# Altium PCB File_Mach_In.PcbDoc
Units mil, origin at the board's own origin, x right, y up, seen from the top; angles counter-clockwise.
Board outline 4955 x 3230 mil, 2 copper layers (Top Layer, Bottom Layer); 64 components, 22 nets, 180 pads, 0 vias.
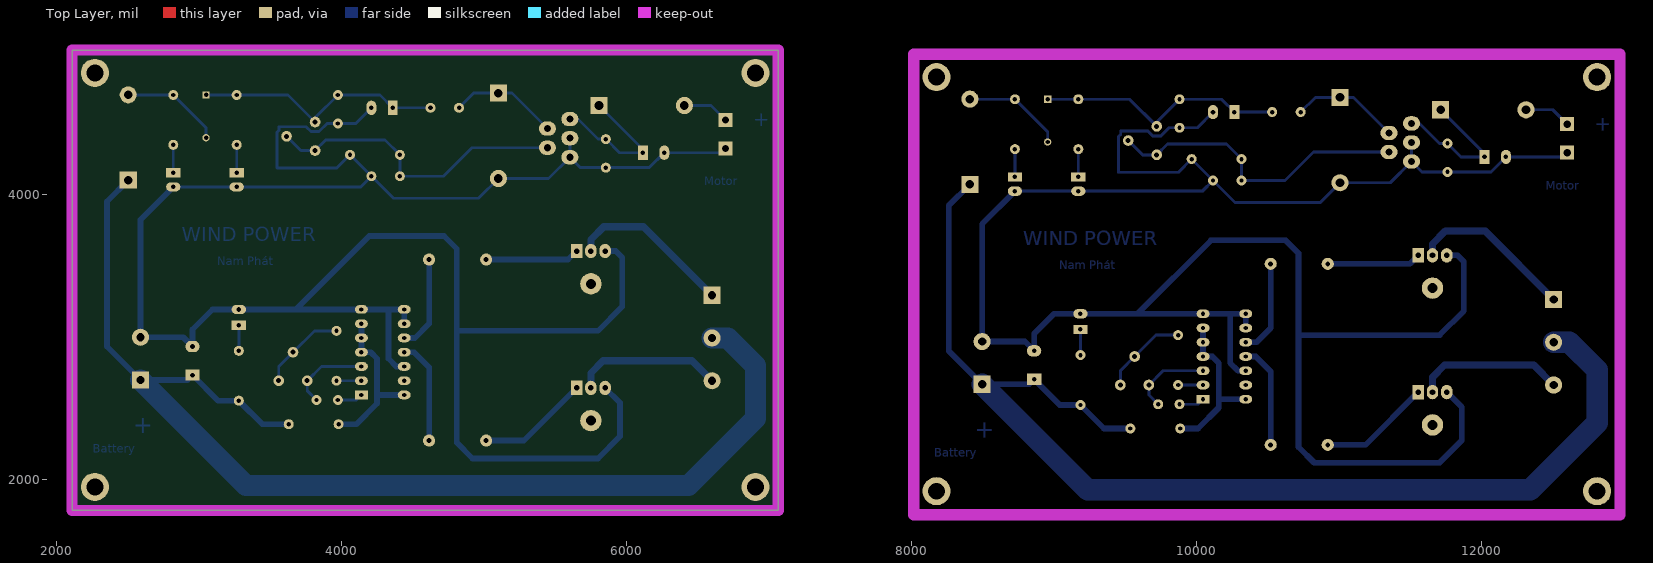
[diagram p0: Top Layer view]
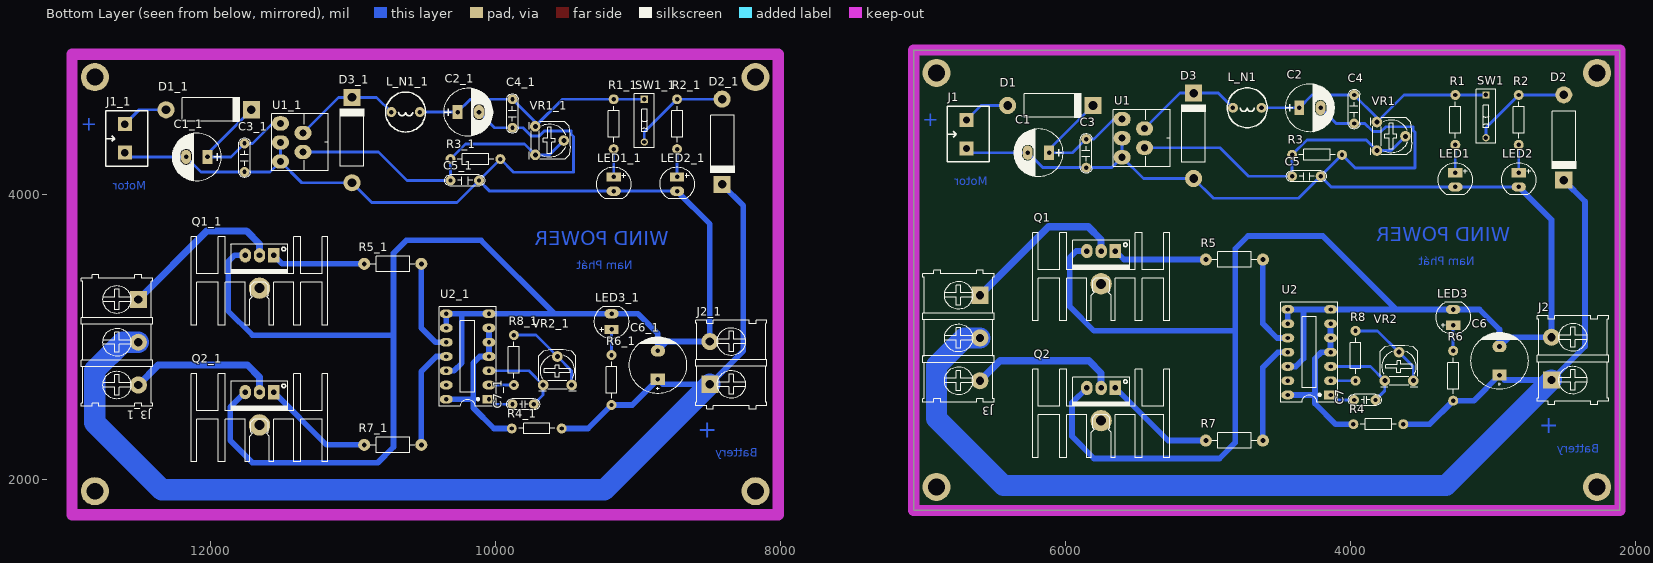
[diagram p1: Bottom Layer view, seen from below]

## Layer stack, top to bottom
Top Solder: solder mask 0.4, Solder Resist, Dk 3.5
Top Layer: signal copper 1.4
Dielectric 1: dielectric 12.6, FR-4, Dk 4.8
Bottom Layer: signal copper 1.4
Bottom Solder: solder mask 0.4, Solder Resist, Dk 3.5

## Board outline
2110,1780 2110,5010 7065,5010 7065,1780

## Design rules (kind name [scope] priority, off if disabled: settings)
Clearance [All] p1: gap=20 ignorepadtopadclearanceinfootprint=FALSE
PolygonConnect [All] p1: connectstyle=Relief reliefconductorwidth=10 reliefentries=4 polygonreliefangle="90 Angle" airgapwidth=10
RoutingVias [All] p1: holewidth=30 width=70 viastyle="Through Hole" minholewidth=30 minwidth=70 maxholewidth=30 maxwidth=70
SolderMaskExpansion [All] p1: expansion=4
Width [All] p1: maxlimit=150 minlimit=20 preferedwidth=20
30 further rules are at their usual default settings.

## Classes and differential pairs
component class File_Nguyen_Ly: C1 C2 C3 C4 C5 C6 C7 D1 D2 D3 J1 J2 J3 L_N1 LED1 LED2 LED3 Q1 Q2 R1 R2 R3 R4 R5 R6 R7 R8 SW1 U1 U2 VR1 VR2

## Components (designator, comment, footprint, x,y, rotation, side; value= is the part's Value field where it differs from the comment)
C1 "220uF/35V" CP1.5/3.4 6115,4290 r0 bottom value=100uF/35V/50V
C1_1 "220uF/35V" CP1.5/3.4 12020,4260 r0 bottom value=100uF/35V/50V (schematic designator C1)
C2 "220uF/35V" CP1.5/3.4 4360,4605 r180 bottom value=100uF/35V/50V
C2_1 "220uF/35V" CP1.5/3.4 10265,4575 r180 bottom value=100uF/35V/50V (schematic designator C2)
C3 "104" CN2 5855,4185 r90 bottom value=0.1uF
C3_1 "104" CN2 11760,4155 r90 bottom value=0.1uF (schematic designator C3)
C4 "104" CN2 3975,4495 r90 bottom value=0.1uF
C4_1 "104" CN2 9880,4465 r90 bottom value=0.1uF (schematic designator C4)
C5 "104" CN2 4210,4125 r0 bottom value=0.1uF
C5_1 "104" CN2 10115,4095 r0 bottom value=0.1uF (schematic designator C5)
C6 "1000uF/50V" CP2/4 2955,2730 r90 bottom value=2200uF/16V
C6_1 "1000uF/50V" CP2/4 8860,2700 r90 bottom value=2200uF/16V (schematic designator C6)
C7 "103" CN1.5 3825,2555 r0 bottom value=0.01uF
C7_1 "103" CN1.5 9730,2525 r0 bottom value=0.01uF (schematic designator C7)
D1 "Diode 3A" DIODE/POW/3A 6105,4620 r180 bottom
D1_1 "Diode 3A" DIODE/POW/3A 12010,4590 r180 bottom (schematic designator D1)
D2 "Diode 3A" DIODE/POW/3A 2505,4395 r270 bottom
D2_1 "Diode 3A" DIODE/POW/3A 8410,4365 r270 bottom (schematic designator D2)
D3 "Diode 3A" DIODE/POW/3A 5100,4410 r90 bottom
D3_1 "Diode 3A" DIODE/POW/3A 11005,4380 r90 bottom (schematic designator D3)
J1 "KF2" KF2-5.08 6695,4420 r90 bottom
J1_1 "KF2" KF2-5.08 12600,4390 r90 bottom (schematic designator J1)
J2 "KF2" KF2-7.62 2440,2845 r90 bottom
J2_1 "KF2" KF2-7.62 8345,2815 r90 bottom (schematic designator J2)
J3 "KF3" KF3-7.62 6750,3140 r270 bottom
J3_1 "KF3" KF3-7.62 12655,3110 r270 bottom (schematic designator J3)
L_N1 "33uH" 100UH 4725,4605 r0 bottom
L_N1_1 "33uH" 100UH 10630,4575 r0 bottom (schematic designator L_N1)
LED1 "LED" LED-5-Green 3265,4150 r270 bottom value="LED 3 ly Single Colour"
LED1_1 "LED" LED-5-Green 9170,4120 r270 bottom value="LED 3 ly Single Colour" (schematic designator LED1)
LED2 "LED" LED-5-RED 2820,4150 r270 bottom value="LED 3 ly Single Colour"
LED2_1 "LED" LED-5-RED 8725,4120 r270 bottom value="LED 3 ly Single Colour" (schematic designator LED2)
LED3 "LED" LED-5-BLUE 3280,3135 r90 bottom value="LED 3 ly Single Colour"
LED3_1 "LED" LED-5-BLUE 9185,3105 r90 bottom value="LED 3 ly Single Colour" (schematic designator LED3)
Q1 "IRFZ44" TO220H2 5750,3600 r0 bottom value=IRF840
Q1_1 "IRFZ44" TO220H2 11655,3570 r0 bottom value=IRF840 (schematic designator Q1)
Q2 "IRFZ44" TO220H2 5750,2640 r0 bottom value=IRF840
Q2_1 "IRFZ44" TO220H2 11655,2610 r0 bottom value=IRF840 (schematic designator Q2)
R1 "2k" R1/4W 3265,4345 r90 bottom value="R1/4W - 1K"
R1_1 "2k" R1/4W 9170,4315 r90 bottom value="R1/4W - 1K" (schematic designator R1)
R2 "2k" R1/4W 2820,4345 r90 bottom value="R1/4W - 1K"
R2_1 "2k" R1/4W 8725,4315 r90 bottom value="R1/4W - 1K" (schematic designator R2)
R3 "3.9k" R1/4W 4060,4275 r0 bottom value="R1/4W - 1K"
R3_1 "3.9k" R1/4W 9965,4245 r0 bottom value="R1/4W - 1K" (schematic designator R3)
R4 "330" R1/4W 3980,2385 r180 bottom value="R1/4W - 1K"
R4_1 "330" R1/4W 9885,2355 r180 bottom value="R1/4W - 1K" (schematic designator R4)
R5 "220" R1/2W 5015,3540 r180 bottom value="R1/4W - 1K"
R5_1 "220" R1/2W 10920,3510 r180 bottom value="R1/4W - 1K" (schematic designator R5)
R6 "1k" R1/4W 3280,2900 r270 bottom value="R1/4W - 1K"
R6_1 "1k" R1/4W 9185,2870 r270 bottom value="R1/4W - 1K" (schematic designator R6)
R7 "220" R1/2W 5015,2270 r180 bottom value="R1/4W - 1K"
R7_1 "220" R1/2W 10920,2240 r180 bottom value="R1/4W - 1K" (schematic designator R7)
R8 "390k" R1/4W 3965,2690 r90 bottom value="R1/4W - 1K"
R8_1 "390k" R1/4W 9870,2660 r90 bottom value="R1/4W - 1K" (schematic designator R8)
SW1 "SW" SW-DIP1-1 3050,4545 r0 bottom value="SW chip 2 pin"
SW1_1 "SW" SW-DIP1-1 8955,4515 r0 bottom value="SW chip 2 pin" (schematic designator SW1)
U1 "LM2976" DIP5 5523.74,4391.93 r270 bottom
U1_1 "LM2976" DIP5 11428.74,4361.93 r270 bottom (schematic designator U1)
U2 "CD4047" DIP14/W0.3 4140,2590 r90 bottom
U2_1 "CD4047" DIP14/W0.3 10045,2560 r90 bottom (schematic designator U2)
VR1 "50K" VR 3815,4505 r270 bottom value="VR 10K"
VR1_1 "50K" VR 9720,4475 r270 bottom value="VR 10K" (schematic designator VR1)
VR2 "100K" VR 3760,2690 r180 bottom value="VR 10K"
VR2_1 "100K" VR 9665,2660 r180 bottom value="VR 10K" (schematic designator VR2)

## Footprints (in the part's own frame and the unit in brackets; to place one, negate y for a bottom-side part, rotate by r counter-clockwise, add the part's x,y. Pads: shape width x height; smd on the part's side, far side on the other; paste and mask are expansions set on the pad)
100UH [mil]
  round 70 hole 32: 1(100,0) 2(-100,0)
  silkscreen extent -140,-140 140,140
CN1.5 [mil]
  round 70 hole 31: 1(0,0) 2(150,0)
  silkscreen extent -40,-40 190,40, body extent -40,-33 190,33, height 235
CN2 [mil]
  round 70 hole 31: 1(0,0) 2(200,0)
  silkscreen extent -40,-40 240,40, body extent -54,-44 260,55, height 407
CP1.5/3.4 [mil] "Tu hoa 220->470uF,16V, 470uF/16V,25V"
  rect 70x100 hole 32: 1(0,0)
  oval 70x100 hole 32: 2(150,0)
  silkscreen extent -95,-170 245,170, body extent -85,-157 230,157, height 446
CP2/4 [mil] "Tu hoa 1000uF/16V/25V"
  rect 80x100 hole 32: 1(0,0)
  oval 80x100 hole 32: 2(200,0)
  silkscreen extent -100,-200 300,200
DIODE/POW/3A [mil]
  round 120 hole 60: 1(-301,1)
  rect 120x120 hole 60: 2(298,1)
  silkscreen extent -186,-85 219,90, body extent -321,-104 321,104, height 248
DIP5 [mm]
  oval 2.54x3.048 hole 1.27: 1(-3.4,-2) 2(-1.7,2) 3(0,-2) 4(1.7,2) 5(3.4,-2)
  silkscreen extent -5.08,-3.61 5.08,6.53, body extent -4.99,-2.25 5.21,6.31, height 18.81
DIP14/W0.3 [mil] "14PIN, W 300mil, Pin to pin 100mil"
  rect 60x90 hole 31: 1(0,0)
  oval 60x90 hole 31: 2(100,0) 3(200,0) 4(300,0) 5(400,0) 6(500,0) 7(600,0) 8(600,300) 9(500,300) 10(400,300) 11(300,300) 12(200,300) 13(100,300) 14(0,300)
  silkscreen extent -50,-50 650,350, body extent -70,-12 680,302, height 145
KF2-5.08 [mm]
  rect 2.5x2.5 hole 1.3: 1(-2.54,0) 2(2.54,0)
  silkscreen extent -4.95,-4.08 4.95,3.43, body extent -5,-4.07 5,3.43, height 10
KF2-7.62 [mil]
  rect 120x120 hole 59.06 unplated: 1(-150,150)
  round 120 hole 59.06 unplated: 2(150,150)
  silkscreen extent -324,-250 300,250, body extent -300,-241 300,231, height 337
KF3-7.62 [mil]
  rect 120x120 hole 59.06 unplated: 1(-150,150)
  round 120 hole 59.06 unplated: 2(150,150) 3(450,150)
  silkscreen extent -324,-250 600,250, body extent -300,-241 600,231, height 337
LED-5-BLUE [mil] "LED 2 PIN, 5 ly , Only colour, pin to pin 110mil"
  rect 65x100 hole 32: 1(-55,0)
  oval 65x100 hole 32: 2(55,0)
  silkscreen extent -120,-120 104,120, body extent -113,-120 100,116, height 339
LED-5-Green [mil] "LED 2 PIN, 5 ly , Only colour,pin to pin 100mil"
  rect 65x100 hole 32: 1(0,0)
  oval 65x100 hole 32: 2(100,0)
  silkscreen extent -70,-120 154,120, body extent -69,-120 145,117, height 339
LED-5-RED [mil] "LED 2 PIN, 5 ly , Only colour,pin to pin 100mil"
  rect 65x100 hole 32: 1(0,0)
  oval 65x100 hole 32: 2(100,0)
  silkscreen extent -70,-120 154,120, body extent -65,-119 149,118, height 339
R1/2W [mil] "R 1/2W, 2 pin, 300mil"
  round 85 hole 35: 1(0,0) 2(400,0)
  silkscreen extent 42,-55 356,55, body extent -12,-45 414,49, height 91
R1/4W [mil] "R 1/4W, 2 Pin, 350mil"
  round 70 hole 31: 1(0,0) 2(350,0)
  silkscreen extent 48,-38 302,38, body extent -40,-47 386,47, height 111
SW-DIP1-1 [mm] "01p, 2.54mm Pitch, Horizontal, Box Type, THT, flat Actuator, red, without Tape, Tube"
  rect 1.3x1.3 hole 0.8: 1(0,-3.81)
  round 1.3 hole 0.8: 2(0,3.81)
  silkscreen extent -1.77,-4.8 1.77,4.8, body extent -1.77,-4.8 1.77,4.8, height 5.4
TO220H2 [mil] "TO-220 - 1-2-3"
  round 150 hole 70: 0(0,230)
  rect 80x100 hole 39: 1(-100,0)
  oval 80x100 hole 39: 2(0,0) 3(100,0)
  silkscreen extent -480,-130 480,490, body extent -449,-177 453,469, height 1206
VR [mil] "Resistor Variable"
  round 75 hole 35: 1(0,0) 2(100,200) 3(200,0)
  silkscreen extent -31,-44 231,246, body extent -87,-30 307,372, height 165

## Part data
C1 C1_1 C2 C2_1: library part CP3, "Cap 100uF/35V - 470uF/16V", Description 1="1000uF/6,3V - 470uF/16V - 330uF - 25V", Description 2="220uF/35V - 100uF/50V - 63V - 4,7uF/200V", Description 3="22uF => 33uF100V - 3,3uF => 4,7uF/250V", Description 4="2,2uF =>3,3uF/350 - 2,2uF/400V - 1uF/450V"
C3 C3_1 C4 C4_1 C5 C5_1: library part CN2, "Cap np 104 => 105pF"
C6 C6_1: library part CP5, "Cap 2200uF/16V - 1000uF/50V", Description 1="4700uF-6800uF/6,3V - 3300uF-4700uF/10V", Description 2="2200uF-3300uF/16V - 470uF => 2200uF/25V", Description 3=1000uF/35V-50V_470uF/63V_220uF>330uF/100V, Description 4="47uF => 100uF/160V - 33uF-47uF/250V", Description 5="47uF/200V - 22uF/350V - 400V - 10uF/450V"
C7 C7_1: library part CN1.5, "Cap np 682pF => 104pF"
D1 D1_1 D2 D2_1 D3 D3_1: library part "Diode Power 3A", "Diode Power", PackageDocument=Aug-1999, ComponentLink1Description="Manufacturer Link", ComponentLink1URL=http://www.fairchildsemi.com/, ComponentLink2Description=Datasheet, ComponentLink2URL=http://www.fairchildsemi.com/ds/1N%2F1N5400.pdf, DatasheetDocument=1998, LatestRevisionDate=17-Jul-2002, LatestRevisionNote="Re-released for DXP Platform.", PackageReference=DO-201AD, Published=8-Jun-2000, Publisher="Altium Limited"
J1 J1_1 J2 J2_1: Manufacturer="Würth Elektronik eiSos GmbH", partNo=691103110002, ComponentLink1 Description=Manufacturer, ComponentLink1URL=http://www.we-online.com, ComponentLink2 Description=Datasheet, ComponentLink2URL=http://katalog.we-online.de/em/datasheet/6911031100xx.pdf, Created by="Karrer Zheng", Created Date="29 October 2013", NoPins=2
J3 J3_1: Manufacturer="Würth Elektronik eiSos GmbH", partNo=691103110003, ComponentLink1 Description=Manufacturer, ComponentLink1URL=http://www.we-online.com, ComponentLink2 Description=Datasheet, ComponentLink2URL=http://katalog.we-online.de/em/datasheet/6911031100xx.pdf, Created by="Karrer Zheng", Created Date="29 October 2013", NoPins=3
L_N1 L_N1_1: library part INDUCTOR1
LED1 LED1_1 LED2 LED2_1 LED3 LED3_1: "LED Single colour Green and Red"
R1 R1_1 R2 R2_1 R3 R3_1 R4 R4_1 R5 R5_1 R6 R6_1 R7 R7_1 R8 R8_1: library part R1/4W, "Resistor 1/4W"
SW1 SW1_1: library part SW2, "Switch button 2 pin"
U1 U1_1: library part LM2596, Max Input Voltage="12 V", Max Output Current="3 (6.0 peak) A", Max Output Voltage=mV, Temperature Range="-40 to +125 degC", Category=IC-Power, Min Input Voltage=mV, Min Output Voltage=mV, Mounting Technology="Surface Mount", Status=Unreleased, Supply Voltage=mV
VR1 VR1_1 VR2 VR2_1: library part VR, "Var Resistor"

## Free pads (board coordinates)
  round 196.85 hole 118.11: 2(2270,1945) 2(2270,4850) 2(6905,1945) 2(6905,4850) 2(8175,1915) 2(8175,4820) 2(12810,1915) 2(12810,4820)

## Nets (pads, with @x,y where several pads share a name; then routed paths per layer and width w, separated by ;. In a path a pad name is that pad's centre, name@x,y a point inside that pad or via, vN(x,y) a via of type N, cw(c..) or ccw(c..) an arc to the next point about the centre after c; other vN are vias at no path point)
+12: C6.1 D2.2 J2.1 J3.2 R4.2 R6.2 | length 8330.4
  Bottom Layer w40: D2.2 2355,3948 2355,2930 J2.1 2920,2695 C6.1 3135,2550 R6.2 3445,2385 R4.2
  Bottom Layer w150: J2.1 3330,1955 6435,1955 6905,2425 6905,2795 6710,2990 J3.2
GND: C1.2 C2.2 C3.1 C4.1 C5.1 C6.2 D3.1 J1.1 J2.2 LED1.2 LED2.2 LED3.2 Q1.3 Q2.3 R3.1 U1.3 U1.5 U2.7 U2.8 U2.9 U2.12 | length 15976.1
  Bottom Layer w20: LED2.2 LED1.2 4135,4050 C5.1 ; C2.2 4100,4495 C4.1 3900.46,4495 3842.96,4437.5 3787.04,4437.5 3752.04,4472.5 3562.5,4472.5 3562.5,4447.96 3547.5,4432.96 3547.5,4182.5 3967.5,4182.5 R3.1 C5.1 ; U1.3 U1.5 ; J1.1 6665,4290 C1.2 6160,4185 C3.1 5675.55,4185 U1.5 ; C5.1 4365,3970 4962,3970 D3.1 5453.41,4109 U1.5
  Bottom Layer w40: LED2.2 2590,3820 J2.2 2890,2995 C6.2 2955,3050 3095,3190 LED3.2 3680,3190 ; U2.12 4385,2790 4330,2845 4330,3190 ; U2.9 U2.8 4330,3190 ; Q2.3 5955,2535 5955,2300 5800,2145 4920,2145 4810,2255 4810,3040 ; Q1.3 5925,3600 5970,3555 5970,3210 5800,3040 4810,3040 ; 3680,3190 4195,3705 4720,3705 4810,3615 4810,3040 ; 3680,3190 U2.7 4330,3190
NetC1_1: C1.1 C3.2 D1.2 U1.1 | length 1068.8
  Bottom Layer w20: U1.1 5659.21,4525.79 5800,4385 C3.2 5950,4290 C1.1 6115,4313 D1.2
NetC2_1: C2.1 C4.2 L_N1.2 R1.2 SW1.1 VR1.1 | length 1787.3
  Bottom Layer w20: SW1.1 R1.2 3625,4695 VR1.1 3815,4535 C4.2 4270,4695 C2.1 L_N1.2
NetC5_2: C5.2 R3.2 U1.4 VR1.2 VR1.3 | length 2178.8
  Bottom Layer w20: VR1.2 3715,4305 VR1.3 3890,4380 4305,4380 R3.2 C5.2 4715,4125 4915,4325 U1.4
NetC7_1: C7.1 U2.3 VR2.1 | length 583.3
  Bottom Layer w20: C7.1 3760,2620 VR2.1 3860,2790 U2.3
NetC7_2: C7.2 U2.1 | length 179.5
  Bottom Layer w20: C7.2 4105,2555 U2.1
NetD1_1: D1.1 J1.2 | length 330.8
  Bottom Layer w20: D1.1 6594,4621 J1.2
NetD2_1: D2.1 R2.2 SW1.2 | length 711.7
  Bottom Layer w20: D2.1 2505,4695 R2.2 3050,4465 SW1.2
NetD3_2: D3.2 L_N1.1 U1.2 | length 765.9
  Bottom Layer w20: L_N1.1 4928,4708 D3.2 5195.86,4708 U1.2
NetJ3_1: J3.1 Q1.2 | length 1166.1
  Bottom Layer w50: Q1.2 5750,3680 5840,3770 6120,3770 J3.1
NetJ3_3: J3.3 Q2.2 | length 1048.2
  Bottom Layer w50: Q2.2 5750,2745 5835,2830 6460,2830 J3.3
NetLED1_1: LED1.1 R1.1 | length 195
  Bottom Layer w20: LED1.1 R1.1
NetLED2_1: LED2.1 R2.1 | length 195
  Bottom Layer w20: LED2.1 R2.1
NetLED3_1: LED3.1 R6.1 | length 180
  Bottom Layer w20: R6.1 LED3.1
NetQ1_1: Q1.1 R5.1 | length 659.9
  Bottom Layer w40: R5.1 5590,3540 Q1.1
NetQ2_1: Q2.1 R7.1 | length 788.3
  Bottom Layer w40: R7.1 5280,2270 Q2.1
NetR4_1: R4.1 U2.4 U2.5 U2.6 U2.14 | length 1167.8
  Bottom Layer w40: R4.1 4105,2385 4250,2530 4250,2600 ; U2.6 U2.5 U2.4 4205,2890 4250,2845 4250,2600 ; U2.14 4260,2590 4250,2600
NetR5_2: R5.2 U2.10 | length 666.4
  Bottom Layer w40: U2.10 4515,2990 4615,3090 R5.2
NetR7_2: R7.2 U2.11 | length 733.5
  Bottom Layer w40: U2.11 4510,2890 4615,2785 R7.2
NetR8_1: R8.1 U2.2 | length 175
  Bottom Layer w20: R8.1 U2.2
NetR8_2: R8.2 VR2.2 VR2.3 | length 608.6
  Bottom Layer w20: VR2.3 3560,2790 VR2.2 3810,3040 R8.2
pads on no net: C1_1.1 C1_1.2 C2_1.1 C2_1.2 C3_1.1 C3_1.2 C4_1.1 C4_1.2 C5_1.1 C5_1.2 C6_1.1 C6_1.2 C7_1.1 C7_1.2 D1_1.1 D1_1.2 D2_1.1 D2_1.2 D3_1.1 D3_1.2 J1_1.1 J1_1.2 J2_1.1 J2_1.2 J3_1.1 J3_1.2 J3_1.3 L_N1_1.1 L_N1_1.2 LED1_1.1 LED1_1.2 LED2_1.1 LED2_1.2 LED3_1.1 LED3_1.2 Q1.0 Q1_1.0 Q1_1.1 Q1_1.2 Q1_1.3 Q2.0 Q2_1.0 Q2_1.1 Q2_1.2 Q2_1.3 R1_1.1 R1_1.2 R2_1.1 R2_1.2 R3_1.1 R3_1.2 R4_1.1 R4_1.2 R5_1.1 R5_1.2 R6_1.1 R6_1.2 R7_1.1 R7_1.2 R8_1.1 R8_1.2 SW1_1.1 SW1_1.2 U1_1.1 U1_1.2 U1_1.3 U1_1.4 U1_1.5 U2.13 U2_1.1 U2_1.2 U2_1.3 U2_1.4 U2_1.5 U2_1.6 U2_1.7 U2_1.8 U2_1.9 U2_1.10 U2_1.11 U2_1.12 U2_1.13 U2_1.14 VR1_1.1 VR1_1.2 VR1_1.3 VR2_1.1 VR2_1.2 VR2_1.3
copper on no net: | length 39496.3
  Bottom Layer w20: 8409,4666 8410,4665 8725,4665 8955,4435 8955,4365 ; 8725,4020 9170,4020 10040,4020 10115,4095 ; 8725,4120 8725,4315 ; 8955,4665 9170,4665 9530,4665 9720,4475 9720,4505 9880,4665 10175,4665 10265,4575 10530,4575 ; 9170,4120 9170,4315 ; 9185,2870 9185,3050 ; 9465,2660 9465,2760 9565,2860 9715,3010 9870,3010 ; 9520,4375 9620,4275 9720,4275 9795,4350 10210,4350 10315,4245 10315,4095 10620,4095 10820,4295 11350,4295 ; 9730,2525 9665,2590 9665,2660 9765,2760 10045,2760 ; 9870,2660 10045,2660 ; 9880,2525 10010,2525 10045,2560 ; 10115,4575 10005,4465 9880,4465 9805.46,4465 9747.96,4407.5 9692.04,4407.5 9657.04,4442.5 9467.5,4442.5 9467.5,4417.96 9452.5,4402.96 9452.5,4152.5 9872.5,4152.5 9965,4245 10115,4095 ; 10730,4575 10833,4678 11006,4678 11100.86,4678 11350,4428.86 ; 11507.48,4361.93 11507.48,4228.07 ; 11507.48,4495.79 11564.21,4495.79 11705,4355 11760,4355 11855,4260 12020,4260 12020,4283 11712,4591 ; 12311,4591 12499,4591 12600,4490 ; 12600,4290 12570,4260 12170,4260 12065,4155 11760,4155 11580.55,4155 11507.48,4228.07 ; 10115,4095 10270,3940 10867,3940 11006,4079 11358.41,4079 11507.48,4228.07
  Bottom Layer w40: 8409,4067 8260,3918 8260,2900 8495,2665 8825,2665 8860,2700 9040,2520 9185,2520 9350,2355 9535,2355 ; 8725,4020 8495,3790 8495,2965 8795,2965 8860,2900 8860,3020 9000,3160 9185,3160 9585,3160 ; 9885,2355 10010,2355 10155,2500 10155,2570 ; 10045,3060 10045,2960 10045,2860 10110,2860 10155,2815 10155,2570 ; 10345,2560 10165,2560 10155,2570 ; 10345,2760 10290,2760 10235,2815 10235,3160 ; 10345,2860 10415,2860 10520,2755 10520,2240 ; 10345,2960 10420,2960 10520,3060 10520,3510 ; 10345,3060 10345,3160 10235,3160 ; 10920,2240 11185,2240 11555,2610 ; 10920,3510 11495,3510 11555,3570 ; 11755,2610 11860,2505 11860,2270 11705,2115 10825,2115 10715,2225 10715,3010 ; 11755,3570 11830,3570 11875,3525 11875,3180 11705,3010 10715,3010 ; 9585,3160 10045,3160 10235,3160 ; 9585,3160 10100,3675 10625,3675 10715,3585 10715,3010
  Bottom Layer w50: 11655,2610 11655,2715 11740,2800 12365,2800 12505,2660 ; 11655,3570 11655,3650 11745,3740 12025,3740 12505,3260
  Bottom Layer w150: 8495,2665 9235,1925 12340,1925 12810,2395 12810,2765 12615,2960 12505,2960

## Keep-outs
Keep-Out Layer:
  lines w78.74: 2110,1780 2110,5010 7065,5010 7065,1780 2110,1780 ; 8015,1750 12970,1750 12970,4980 8015,4980 8015,1750

## Other copper
Bottom Layer:
  text "+" at 6890,4475 h100
  text "+" at 12795,4445 h100
  text "Motor" at 6545,4060 h60
  text "Motor" at 12450,4030 h60
  text "WIND POWER" at 2880,3670 h100
  text "WIND POWER" at 8785,3640 h100
  text "Nam Phát" at 3130,3480 h100
  text "Nam Phát" at 9035,3450 h100
  text "+" at 2540,2320 h120
  text "+" at 8445,2290 h120
  text "Battery" at 2255,2185 h60
  text "Battery" at 8160,2155 h60

## Dimensions
7260,5050 to 7160,1740 on Multi-Layer
2070,5260 to 7105,5315 on Multi-Layer